# Altium PCB OpticalFlowExt.PcbDoc
Units mm, origin at the board's own origin, x right, y up, seen from the top; angles counter-clockwise.
Board outline 17.78 x 23.88 mm, 2 copper layers (Top Layer, Bottom Layer), stack 1.07 mm thick; 30 components, 31 nets, 147 pads, 25 vias.
Unrouted connection lines stored in the file: 92.
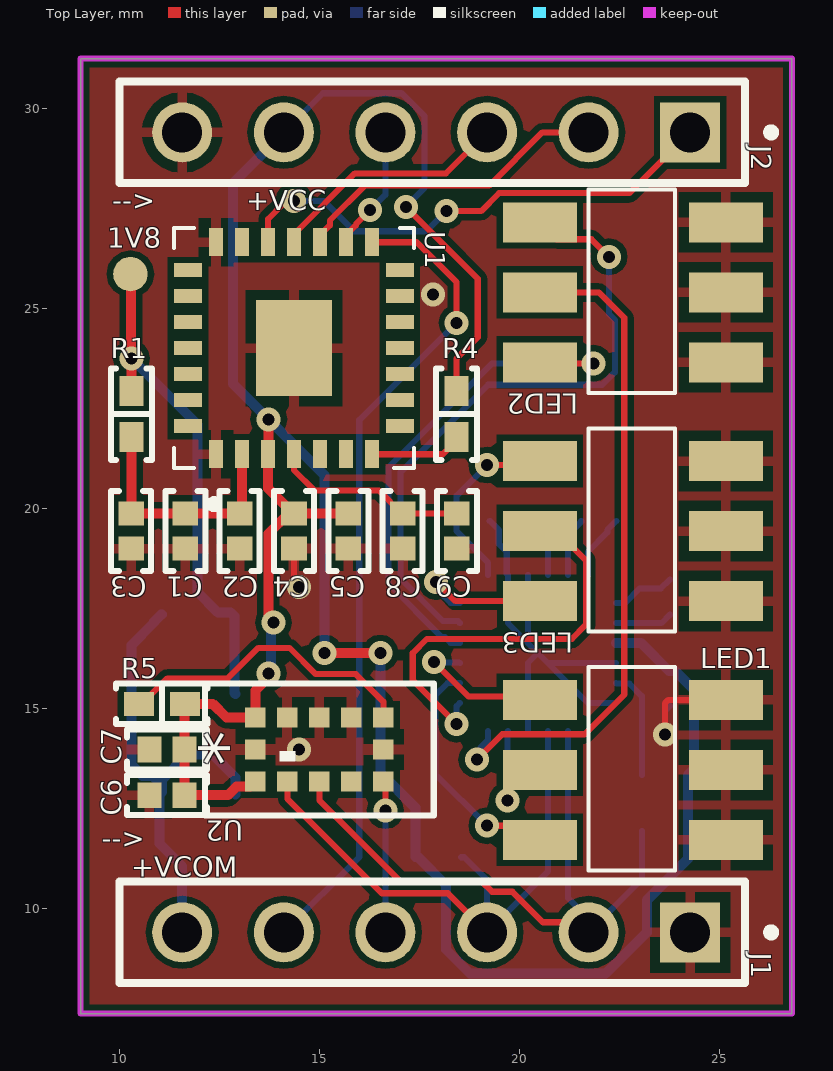
[diagram p0: Top Layer view]
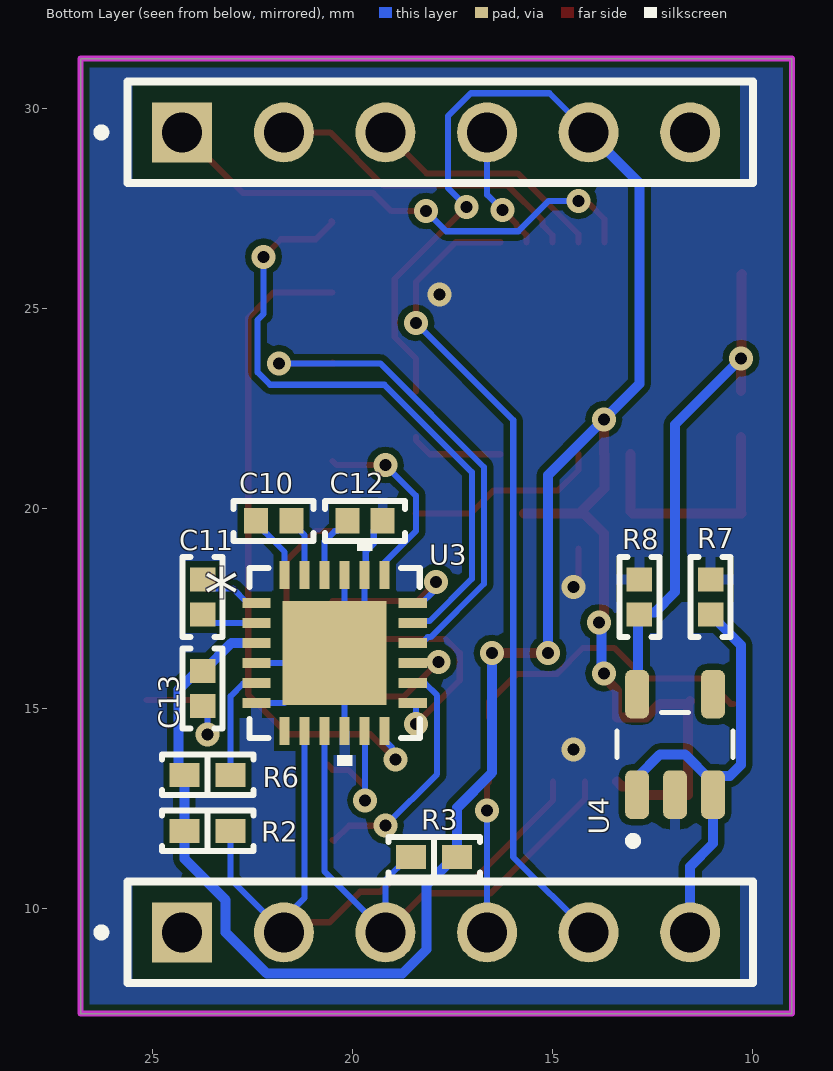
[diagram p1: Bottom Layer view, seen from below]

## Layer stack, top to bottom
Top Solder: solder mask 0.0254, SM-001, Dk 4
Top Layer: signal copper 0.035
Dielectric 1: core 1, FR-4, Dk 4.3
Bottom Layer: signal copper 0.035
Bottom Solder: solder mask 0.0254, SM-001, Dk 4

## Board outline
9.017,7.366 9.017,31.242 26.797,31.242 26.797,7.366

## Design rules (kind name [scope] priority, off if disabled: settings)
Clearance [All] p1: gap=0.152 ignorepadtopadclearanceinfootprint=TRUE except(0: Arc-Text Track-Text SMDPad-Text THPad-Text Via-Text Fill-Text Poly-Text Region-Text Text-Text Text-Hole)
ComponentClearance [All] p1: gap=0.15 collisioncheckmode=3 verticalgap=0.254 showdistances=TRUE
HoleSize [All] p1: absolutevalues=TRUE maxlimit=2.54 minlimit=0.3 maxpercent=80.000 minpercent=20.000
HoleToHoleClearance [All] p1: gap=0.152 allowstackedmicrovias=TRUE
MinimumSolderMaskSliver [All] p1: minsoldermaskwidth=0
PlaneConnect [All] p1: planeconnectstyle=Direct reliefexpansion=0.508 reliefentries=4 reliefconductorwidth=0.254 reliefairgap=0.254
PolygonConnect GND-Base [IsNamedPolygon('GND_L01_P030') vs HasFootprint('SIERRA_WP_SNAP-IN_BASE')] p1: connectstyle=Direct reliefconductorwidth=0.254 reliefentries=4 polygonreliefangle="90 Angle" airgapwidth=0.254
PolygonConnect [All] p2: thpad.connectstyle=Relief thpad.reliefconductorwidth=0.254 thpad.reliefentries=4 thpad.polygonreliefangle="90 Angle" thpad.airgapwidth=0.254 smdpad.connectstyle=Relief smdpad.reliefconductorwidth=0.254 smdpad.reliefentries=4 smdpad.polygonreliefangle="90 Angle" smdpad.airgapwidth=0.254 via.connectstyle=Direct via.reliefconductorwidth=0.254 via.reliefentries=4 via.polygonreliefangle="90 Angle" via.airgapwidth=0.254
RoutingVias [All] p1: holewidth=0.3 width=0.6 viastyle="Through Hole" minholewidth=0.3 minwidth=0.6 maxholewidth=0.711 maxwidth=10
SilkToSilkClearance [All] p1: silktosilkclearance=0
SilkToSolderMaskClearance [IsPad] p1: minsilkscreentomaskgap=0 clearancetoexposedcopper=TRUE
SolderMaskExpansion [All] p1: expansion=0.102
Width [All] p1: maxlimit=10 minlimit=0.152 preferedwidth=0.152 minimp=50.000000 maximp=50.000000 favimp=50.000000
23 further rules are at their usual default settings.

## Components (designator, comment, footprint, x,y, rotation, side; value= is the part's Value field where it differs from the comment)
C1 "22uF" "CAP 0402_1005" 11.636,19.431 r90 top
C2 "22uF" "CAP 0402_1005" 12.994,19.431 r90 top
C3 "100nF" "CAP 0402_1005" 10.279,19.431 r90 top
C4 "10uF" "CAP 0402_1005" 14.351,19.431 r90 top
C5 "100nF" "CAP 0402_1005" 15.708,19.431 r90 top
C6 "4.7uF" "CAP 0402_1005" 11.176,12.827 r0 top
C7 "100nF" "CAP 0402_1005" 11.176,13.97 r0 top
C8 "10nF" "CAP 0402_1005" 17.066,19.431 r90 top
C9 "100nF" "CAP 0402_1005" 18.423,19.431 r90 top
C10 "0.47uF" "CAP 0402_1005" 21.971,19.685 r0 bottom
C11 "0.47uF" "CAP 0402_1005" 23.749,17.78 r90 bottom
C12 "1uF" "CAP 0402_1005" 19.685,19.685 r0 bottom
C13 "100nF" "CAP 0402_1005" 23.749,15.494 r90 bottom
J1 "Pin header Male 6pos" "6 pin pads" 24.257,9.398 r180 top locked
J2 "Pin header Male 6pos" "6 pin pads" 24.257,29.398 r180 top locked
LED1 "LED RGB" "LED RGB" 25.146,11.712 r90 top
LED2 "LED RGB" "LED RGB" 25.146,23.65 r90 top
LED3 "LED RGB" "LED RGB" 25.146,17.681 r90 top
R1 "0" "RES 0402_1005" 10.287,22.352 r270 top
R2 "4.7k" "RES 0402_1005" 23.622,11.938 r0 bottom
R3 "4.7k" "RES 0402_1005" 17.958,11.278 r180 bottom
R4 "47K" "RES 0402_1005" 18.415,22.352 r90 top
R5 "47K" "RES 0402_1005" 11.049,15.113 r0 top
R6 "47K" "RES 0402_1005" 23.622,13.335 r0 bottom
R7 "1uF" "CAP 0402_1005" 11.049,17.78 r270 bottom
R8 "1uF" "CAP 0402_1005" 12.827,17.78 r270 bottom
U1 "PMW3901MB-TXQT" PMW3901MBTXQT 14.351,24.003 r90 top
U2 "VL53L0CXV0DH/1" LGA12_STM 14.986,13.97 r90 top
U3 "LP55231SQX/NOPB" RTW24_TEX 20.447,16.383 r180 bottom
U4 "TLV70212DBVT" SOT95P280X145-5N 11.938,14.097 r90 bottom

## Footprints (in the part's own frame and the unit in brackets; to place one, negate y for a bottom-side part, rotate by r counter-clockwise, add the part's x,y. Pads: shape width x height; smd on the part's side, far side on the other; paste and mask are expansions set on the pad)
"6 pin pads" [mm]
  rect 1.5x1.5 hole 1: 1(0,0)
  round 1.5 hole 1: 2(2.54,0) 3(5.08,0) 4(7.62,0) 5(10.16,0) 6(12.7,0)
  silkscreen extent -2.12,-1.27 14.27,1.27, body extent -1.07,-1.17 13.77,1.17, height 8.18
"CAP 0402_1005" [mm] "Chip Capacitor, 2-Leads, Body 1.02x0.51mm, IPC Medium Density"
  rect 0.6x0.64 smd: 1(-0.44,0) 2(0.44,0)
  silkscreen extent -1,-0.5 1,0.5, body extent -0.5,-0.26 0.5,0.26, height 0.52
"LED RGB" [mm]
  round 0.3 on Top Overlay: 0(-1.143,1.016)
  rect 1x1.85 smd: 1(0,0) 2(1.75,0) 3(3.5,0) 4(0,4.65) 5(1.75,4.65) 6(3.5,4.65)
  silkscreen extent -0.76,1.27 4.32,3.43, body extent -0.77,-0.3 4.23,5.2, height 1.81
LGA12_STM [mil]
  rect 20x20 smd paste-10 mask+0: 1(31.5,62.99) 2(31.5,31.5) 3(31.5,0) 4(31.5,-31.5) 5(31.5,-62.99) 6(0,-62.99) 7(-31.5,-62.99) 8(-31.5,-31.5) 9(-31.5,0) 10(-31.5,31.5) 11(-31.5,62.99) 12(0,62.99)
  silkscreen extent -65,-112 65,112, body extent -52,-99 52,99, height 41
PMW3901MBTXQT [mm]
  rect 0.7x0.35 smd: 1(-2.65,1.95) 2(-2.65,1.3) 3(-2.65,0.65) 4(-2.65,0) 5(-2.65,-0.65) 6(-2.65,-1.3) 7(-2.65,-1.95) 15(2.65,-1.95) 16(2.65,-1.3) 17(2.65,-0.65) 18(2.65,0) 19(2.65,0.65) 20(2.65,1.3) 21(2.65,1.95)
  rect 0.35x0.7 smd: 8(-1.95,-2.65) 9(-1.3,-2.65) 10(-0.65,-2.65) 11(0,-2.65) 12(0.65,-2.65) 13(1.3,-2.65) 14(1.95,-2.65) 22(1.95,2.65) 23(1.3,2.65) 24(0.65,2.65) 25(0,2.65) 26(-0.65,2.65) 27(-1.3,2.65) 28(-1.95,2.65)
  rect 2.4x1.9 smd: 29(0,0)
  silkscreen extent -4,-3 3,3, body extent -3,-3 3,3, height 2.46
"RES 0402_1005" [mm] "Chip Resistor, 2-Leads, Body 1.0x0.5mm, IPC Medium Density"
  rect 0.75x0.6 smd: 1(-0.575,0) 2(0.575,0)
  silkscreen extent -1.14,-0.51 1.14,0.51, body extent -0.5,-0.25 0.5,0.25, height 0.35
RTW24_TEX [mm]
  rect 0.705x0.25 smd paste+0 mask+0: 1(-1.952,1.25) 2(-1.952,0.75) 3(-1.952,0.25) 4(-1.952,-0.25) 5(-1.952,-0.75) 6(-1.952,-1.25) 13(1.952,-1.25) 14(1.952,-0.75) 15(1.952,-0.25) 16(1.952,0.25) 17(1.952,0.75) 18(1.952,1.25)
  rect 0.25x0.705 smd paste+0 mask+0: 7(-1.25,-1.952) 8(-0.75,-1.952) 9(-0.25,-1.952) 10(0.25,-1.952) 11(0.75,-1.952) 12(1.25,-1.952) 19(1.25,1.952) 20(0.75,1.952) 21(0.25,1.952) 22(-0.25,1.952) 23(-0.75,1.952) 24(-1.25,1.952)
  rect 2.6x2.6 smd paste-1.287 mask+0: 25(0,0)
  silkscreen extent -2.13,-2.81 2.13,2.81, body extent -1.87,-1.91 2.13,2.09, height 1.4
SOT95P280X145-5N [mm]
  rrect50% 1.21x0.59 smd: 1(-1.255,0.95) 2(-1.255,0) 3(-1.255,-0.95) 4(1.255,-0.95) 5(1.255,0.95)
  silkscreen extent -2.51,-1.45 0.8,1.45, body extent -1.4,-1.45 1.4,1.45, height 1.44

## Part data
C1 C2 C3 C4 C5 C6 C7 C8 C9 C10 C11 C12 C13 R7 R8: library part C0402C151F5GAC7867, "CAP CER 150PF 50V NP0 0402", Capacitance=150pF, Device Package="0402 (1005 Metric)", Manufacturer=KEMET, Operating Temperature="-55°C ~ 125°C", Supplier Part Number 1=399-14269-1-ND, Temperature Coefficient="C0G, NP0", Tolerance=±1%, Voltage - Rated=50V, Applications="General Purpose", ComponentLink1Description=Datasheet, ComponentLink1URL=https://api.kemet.com/component-edge/download/datasheet/C0402C151F5GAC7867.pdf, ComponentLink2Description="DigiKey Link", ComponentLink2URL=http://digikey.com/product-detail/en/kemet/C0402C151F5GAC7867/399-14269-1-ND/6827260, Features="Low ESL", LastUpdated="4/1/2020 11:57:05 PM", Lifecycle Status=Active, Minimum Order=1, Mounting Type="Surface Mount, MLCC", Package / Case="0402 (1005 Metric)", Packaging=TapeAndReel, PartId=1709, Part Number=C0402C151F5GAC7867, Part Status=Active, Price=0.43, Series="SMD Comm C0G", Size / Dimension="0.039\" L x 0.020\" W (1.00mm x 0.50mm)", Supplier 1=DigiKey, Thickness (Max)="0.022\" (0.55mm)"
J1 J2: "male pin header 6 pos"
LED1 LED2 LED3: "703-1039 element14"
R1 R2 R3 R4 R5 R6: library part RC0402FR-0747K5L, "RES SMD 47.5K OHM 1% 1/16W 0402", Device Package="0402 (1005 Metric)", Manufacturer=Yageo, Operating Temperature="-55°C ~ 155°C", Power (Watts)="0.063W, 1/16W", Resistance="47.5 kOhms", Supplier Device Package=0402, Supplier Part Number 1=311-47.5KLRCT-ND, Temperature Coefficient=±100ppm/°C, Tolerance=±1%, ComponentLink1Description=Datasheet, ComponentLink1URL=https://www.yageo.com/upload/media/product/productsearch/datasheet/rchip/PYu-RC_Group_51_RoHS_L_10.pdf, ComponentLink2Description="DigiKey Link", ComponentLink2URL=http://digikey.com/product-detail/en/yageo/RC0402FR-0747K5L/311-47.5KLRCT-ND/729564, Composition="Thick Film", Features="Moisture Resistant", Height - Seated (Max)="0.016\" (0.40mm)", LastUpdated="1/21/2020 12:06:03 AM", Lifecycle Status=Active, Minimum Order=1, Number of Terminations=2, Package / Case="0402 (1005 Metric)", Packaging=CutTape, PartId=2538, Part Number=RC0402FR-0747K5L, Part Status=Active, Price=0.10, Series=RC, Size / Dimension="0.039\" L x 0.020\" W (1.00mm x 0.50mm)", Supplier 1=DigiKey
U1: "Integrated Circuit", Manufacturer_Name="PixArt Imaging Inc.", Arrow Part Number=PMW3901MB-TXQT, Datasheet Link=http://www.pixart.com.tw/upload/POT0189-PMW3901MB-TXQT-DS-R1.10-200617%20(NonNDA)_20170720181537_20170802183402.pdf, Height=2.36mm, Manufacturer_Part_Number=PMW3901MB-TXQT
U2 U3: "No Description Available", Copyright="Copyright (C) 2018 Accelerated Designs. All rights reserved", RefDes=RefDes, Type=DEV
  U2: Built_By=EMA_Jessica, Manufacturer_Part_Number=VL53L0CXV0DH/1, SourceLibrary=STMicro_2020-01-02, Vendor=STMicroelectronics
  U3: Built_By=EMA_UL_Team, Manufacturer_Part_Number=LP55231SQX/NOPB, SourceLibrary=TI_2016-08-12, Vendor="Texas Instruments"
U4: library part LDO1.8, "300-mA, high-PSRR, low-IQ, low-dropout voltage regulator with enable 5-SOT-23 -40 to 125", Package="SOT-23-5 Texas Instruments", Availability=Unavailable, DigiKey-Purchase-URL=https://snapeda.com/shop?store=DigiKey&id=799111, MF="Texas Instruments", Mouser-Purchase-URL=https://snapeda.com/shop?store=Mouser&id=799111, MP=TLV70212DBVT, Price=None, SnapEDA_Link=https://www.snapeda.com/parts/TLV70212DBVT/Texas%20Instruments/view-part/799111/?ref=snap, Texas_Instruments-Purchase-URL=https://snapeda.com/shop?store=Texas+Instruments&id=799111

## Free pads (board coordinates)
  round 0.864 smd: 2(10.262,25.857)

## Via types
v1: diameter 0.6, hole 0.3, Top Layer to Bottom Layer, tented both sides, 25 vias

## Nets (pads, with @x,y where several pads share a name; then routed paths per layer and width w, separated by ;. In a path a pad name is that pad's centre, name@x,y a point inside that pad or via, vN(x,y) a via of type N, cw(c..) or ccw(c..) an arc to the next point about the centre after c; other vN are vias at no path point)
1V8: pad.2 R1.1 R8.2 U4.5 | length 12.6
  Top Layer w0.25: pad.2 10.274,25.845 10.274,23.762 v1(10.287,23.749) R1.1
  Bottom Layer w0.25: v1(10.287,23.749) 11.938,22.098 11.938,17.907 12.446,17.399 12.768,17.399 R8.2 12.858,17.309 12.858,15.382 U4.5
E_IO1: J1.4 U2.7 | length 3.8
  Top Layer w0.152: U2.7 16.637,13.119 v1(16.637,12.446)
  Bottom Layer w0.152: J1.4 v1(16.637,12.446)
E_IO2: J1.5 U1.15 | length 20.6
  Top Layer w0.152: U1.15 17.416,26.653 18.415,25.654 v1(18.415,24.638)
  Bottom Layer w0.152: J1.5 15.981,11.282 15.981,22.204 v1(18.415,24.638)
E_SCL: J1.3 R3.1 U2.10 U3.9 | length 14.7
  Top Layer w0.152: U2.10 14.186,12.738 16.547,10.377 18.198,10.377 J1.3
  Bottom Layer w0.152: R3.1 18.608,11.278 19.177,10.708 J1.3 20.697,10.918 U3.9
E_SDA: J1.2 R2.1 U2.9 U3.8 | length 17.1
  Top Layer w0.152: U2.9 14.986,12.7 17.005,10.681 19.037,10.681 19.304,10.414 19.812,10.414 20.574,9.652 21.717,9.652 J1.2
  Bottom Layer w0.152: U3.8 21.197,10.262 21.717,9.742 J1.2 23.047,10.728 R2.1
E_SPI_MISO: J2.3 U1.18 | length 6.1
  Top Layer w0.152: U1.18 14.351,26.851 15.872,28.372 18.151,28.372 J2.3
E_SPI_MOSI: J2.4 U1.16 | length 3.2
  Top Layer w0.152: U1.16 15.651,26.828 15.897,27.074 15.897,27.098 v1(16.256,27.456)
  Bottom Layer w0.152: v1(16.256,27.456) 16.637,27.837 J2.4
E_SPI_NSS: J2.1 U1.19 | length 12.7
  Top Layer w0.152: U1.19 13.701,27.232 14.07,27.6 14.265,27.6 v1(14.351,27.686) ; v1(18.161,27.432) 19.03,27.432 19.476,27.879 22.738,27.879 J2.1
  Bottom Layer w0.152: v1(14.351,27.686) 15.094,27.686 15.853,26.928 17.657,26.928 v1(18.161,27.432)
E_SPI_SCK: J2.2 U1.17 | length 8
  Top Layer w0.152: U1.17 15.001,26.828 15.247,27.074 15.247,27.195 16.119,28.067 19.23,28.067 20.561,29.398 J2.2
E_VCOM: J1.6 R7.2 U4.1 U4.3 | length 12.1
  Bottom Layer w0.25: R7.2 11.029,17.34 10.854,17.165 10.854,17.145 10.287,16.578 10.287,13.589 10.568,13.308 10.82,13.308 10.988,13.14 U4.3 ; J1.6 11.557,11.049 10.988,11.618 U4.3 ; U4.1 12.888,13.274 12.319,13.843 11.684,13.843 11.049,13.208 11.049,12.903 U4.3
GND: C1.1 C2.1 C3.1 C4.1 C5.1 C6.1 C7.1 C8.1 C9.1 C12.1 C13.1 J1.1 J2.6 LED1.1 LED1.2 LED1.3 LED2.1 LED2.2 LED2.3 LED3.1 LED3.2 LED3.3 R7.1 R8.1 U1.1 U1.21 U1.29 U2.2 U2.3 U2.4 U2.6 U2.12 U3.4 U3.6 U3.10 U3.20 U3.21 U3.25 U4.2 | length 15.8
  Top Layer w0.152: C4.1 14.351,18.161 v1(14.478,18.034) ; v1(23.622,14.351) 23.622,15.123 23.711,15.212 LED1.3
  Bottom Layer w0.152: C12.1 19.469,19.461 19.469,19.116 19.669,18.916 19.669,18.364 U3.20 19.697,17.133 U3.25@20.197,16.633 ; U3.10 20.197,16.133 U3.25 ; U3.21 U3.25@20.197,16.633 ; U3.6 21.697,15.133 U3.25@20.697,16.133 ; U3.4 U3.25@20.697,16.133 ; v1(23.622,14.351) 23.622,14.927 C13.1 ; U3.25@20.197,16.633 U3.25 ; U3.25 U3.25@20.697,16.133
  other v1: 14.478,13.97 17.831,25.349
NetC1_2: C1.2 C2.2 C3.2 R1.2 U1.2 | length 6.1
  Top Layer w0.254: R1.2 10.287,19.879 C3.2 C1.2 C2.2 13.051,19.928 U1.2
NetC8_2: C8.2 C9.2 U1.4 | length 4.9
  Top Layer w0.152: U1.4 14.351,20.955 14.859,20.447 16.47,20.447 17.046,19.871 C8.2 C9.2
NetC10_1: C10.1 U3.23 | length 1.5
  Bottom Layer w0.152: U3.23 21.197,19.331 21.531,19.665 C10.1
NetC10_2: C10.2 U3.24 | length 1.6
  Bottom Layer w0.152: U3.24 21.697,18.908 22.187,19.398 22.187,19.461 C10.2
NetC11_1: C11.1 U3.2 | length 1.4
  Bottom Layer w0.152: U3.2 23.542,17.133 C11.1
NetC11_2: C11.2 U3.1 | length 1.6
  Bottom Layer w0.152: U3.1 22.627,17.633 22.99,17.996 23.525,17.996 C11.2
NetC12_2: C12.2 U3.22 | length 1.6
  Bottom Layer w0.152: C12.2 20.125,19.665 20.349,19.441 20.369,19.441 20.379,19.431 20.447,19.431 20.697,19.181 U3.22
NetLED1_4: LED1.4 U3.14 | length 6
  Top Layer w0.152: v1(19.177,12.065) 20.087,12.065 20.468,11.684 LED1.4
  Bottom Layer w0.152: U3.14 18.194,15.633 17.886,15.325 17.886,13.356 v1(19.177,12.065)
NetLED1_5: LED1.5 U3.11 | length 3.3
  Top Layer w0.152: v1@19.734,12.7 v1(19.685,12.7) 19.685,13.038 20.109,13.462 LED1.5 LED1.5@20.623,13.589
  Bottom Layer w0.152: v1(19.685,12.7) 19.697,12.712 19.691,12.718 19.691,14.425 U3.11
NetLED1_6: LED1.6 U3.15 | length 3.7
  Top Layer w0.152: v1(17.849,16.162) 18.72,15.291 20.048,15.291 20.127,15.212 LED1.6
  Bottom Layer w0.152: v1(17.849,16.162) 17.863,16.147 18.48,16.147 U3.15
NetLED2_4: LED2.4 U3.16 | length 12.9
  Top Layer w0.152: LED2.4 20.468,23.622 v1(21.844,23.622)
  Bottom Layer w0.152: U3.16 18.267,16.633 18.121,16.779 18.048,16.779 16.713,18.114 16.713,21.031 19.304,23.622 v1(21.844,23.622)
NetLED2_5: LED2.5 U3.12 | length 17
  Top Layer w0.152: v1(18.923,13.716) 19.558,14.351 21.615,14.351 22.606,15.342 22.606,24.765 21.971,25.4 LED2.5
  Bottom Layer w0.152: v1(18.923,13.716) 19.009,13.802 19.009,14.015 19.197,14.203 U3.12
NetLED2_6: LED2.6 U3.17 | length 16.1
  Top Layer w0.152: LED2.6@20.524,27.178 LED2.6 20.92,26.726 21.788,26.726 v1(22.225,26.289)
  Bottom Layer w0.152: U3.17 18.446,17.182 18.076,17.182 17.018,18.24 17.018,20.905 19.202,23.089 22.058,23.089 22.373,23.403 22.373,24.712 22.225,24.859 v1(22.225,26.289)
NetLED3_4: LED3.4 U3.18 | length 3.7
  Top Layer w0.152: v1(17.907,18.161) 18.387,17.681 LED3.4
  Bottom Layer w0.152: v1(17.907,18.161) 17.993,18.075 17.993,17.908 18.267,17.633 U3.18
NetLED3_5: LED3.5 U3.13 | length 10.5
  Top Layer w0.152: v1(18.415,14.605) 17.32,15.7 17.32,16.381 17.673,16.733 21.297,16.733 21.65,17.086 21.65,18.702 20.921,19.431 LED3.5
  Bottom Layer w0.152: v1(18.415,14.605) 18.415,15.053 U3.13
NetLED3_6: LED3.6 U3.19 | length 4.7
  Top Layer w0.152: v1(19.177,21.082) 20.397,21.082 LED3.6
  Bottom Layer w0.152: v1(19.177,21.082) 18.415,20.32 18.415,19.431 19.197,18.649 U3.19
NetR4_1: R4.1 U1.7 | length 2.3
  Top Layer w0.152: U1.7 18.066,21.353 18.415,21.702 R4.1
NetR5_1: R5.1 U2.5 | length 7.6
  Top Layer w0.152: R5.1 10.549,15.113 11.184,15.748 12.7,15.748 13.462,16.51 14.238,16.51 14.894,15.854 15.896,15.854 16.586,15.164 U2.5
NetR6_1: R6.1 U3.5 | length 2.8
  Bottom Layer w0.152: U3.5 22.411,15.621 22.733,15.621 23.047,15.307 R6.1
VCC: C4.2 C5.2 C6.2 C7.2 C13.2 J2.5 R2.2 R3.2 R4.2 R5.2 R6.2 U1.3 U2.1 U2.11 U3.3 | length 66.8
  Top Layer w0.152: v1(17.145,27.538) 18.944,25.74 18.944,24.278 18.415,23.749 R4.2
  Top Layer w0.25: R5.2@11.557,15.18 R5.2 ; U2.11 13.257,13.041 12.914,13.041 12.7,12.827 C6.2 C7.2 11.616,15.105 R5.2 ; v1(13.716,15.875) 13.716,15.78 13.386,15.45 U2.1 12.662,14.77 12.319,15.113 R5.2 ; v1(13.716,22.225) 13.708,22.217 13.708,21.361 U1.3 13.701,20.501 C4.2@14.331,19.871 ; v1(13.843,17.145) 13.843,17.212 13.716,17.339 13.716,19.368 14.219,19.871 C4.2 C5.2 ; v1(15.113,16.383) v1(16.51,16.383)
  Bottom Layer w0.152: J2.5 15.076,30.377 17.042,30.377 17.616,29.803 17.616,28.009 v1(17.145,27.538)
  Bottom Layer w0.25: v1(13.716,15.875) 13.779,15.938 13.779,17.081 v1(13.843,17.145) ; J2.5 12.827,28.128 12.827,23.114 v1(13.716,22.225) 15.113,20.828 v1(15.113,16.383) ; v1(16.51,16.383) 16.51,13.39 17.383,12.517 R3.2 17.458,11.278 18.15,10.586 18.15,8.972 18.751,8.371 22.143,8.371 23.17,9.398 23.17,10.203 24.197,11.23 R6.2 24.346,13.484 24.346,15.469 23.881,15.934 C13.2 23.729,15.934 23.03,16.633 U3.3
pads on no net: LED1.0 LED2.0 LED3.0 U1.5 U1.6 U1.8 U1.9 U1.10 U1.11 U1.12 U1.13 U1.14 U1.20 U1.22 U1.23 U1.24 U1.25 U1.26 U1.27 U1.28 U2.8 U3.7 U4.4

## Polygon pours and split planes (outlines as drawn)
GND on Top Layer "GND_L01_P002" (solid, remove dead copper, pour order 2): 26.67,31.115 9.144,31.115 9.144,7.493 26.67,7.493
GND on Top Layer "GND_L01_P004" (solid, remove dead copper, pour order 4): 11.577,16.48 16.586,16.536 16.586,13.17 13.043,13.17 12.7,12.827 11.651,12.827
GND on Bottom Layer "GND_L02_P000" (solid, remove dead copper, pour order 0): 26.67,31.115 9.144,31.115 9.144,7.493 26.67,7.493

## Keep-outs
Keep-Out Layer:
  lines w0.025: 9.017,7.366 26.797,7.366 26.797,31.242 9.017,31.242 9.017,7.366
  lines w0.152: 9.017,7.366 26.797,7.366 26.797,31.242 9.017,31.242 9.017,7.366

## Silkscreen, mask and mechanical layers (free items; w line width, h text height)
Top Overlay:
  text "-->" at 9.804,27.457 h0.5
  text "+VCC" at 13.157,27.457 h0.5
  text "1V8" at 9.677,26.518 h0.5
  text "-->" at 9.55,11.506 h0.5
  text "+VCOM" at 10.287,10.795 h0.5

## Text inside footprints (layer, text, board x,y; h text height)
U2: Top Overlay "*" at 13.24,13.563 h1.27 r90; Mechanical 13 "*" at 13.621,14.96 h1.27 r90
U3: Mechanical 13 "*" at 22.364,17.248 h1.27; Bottom Overlay "*" at 23.704,17.248 h1.27